# Altium PCB USB DockerPi MainBoard.PcbDoc
Units mm, origin at the board's own origin, x right, y up, seen from the top; angles counter-clockwise.
Board outline 65.99 x 57.08 mm, 2 copper layers (Top Layer, Bottom Layer); 33 components, 35 nets, 167 pads, 77 vias.
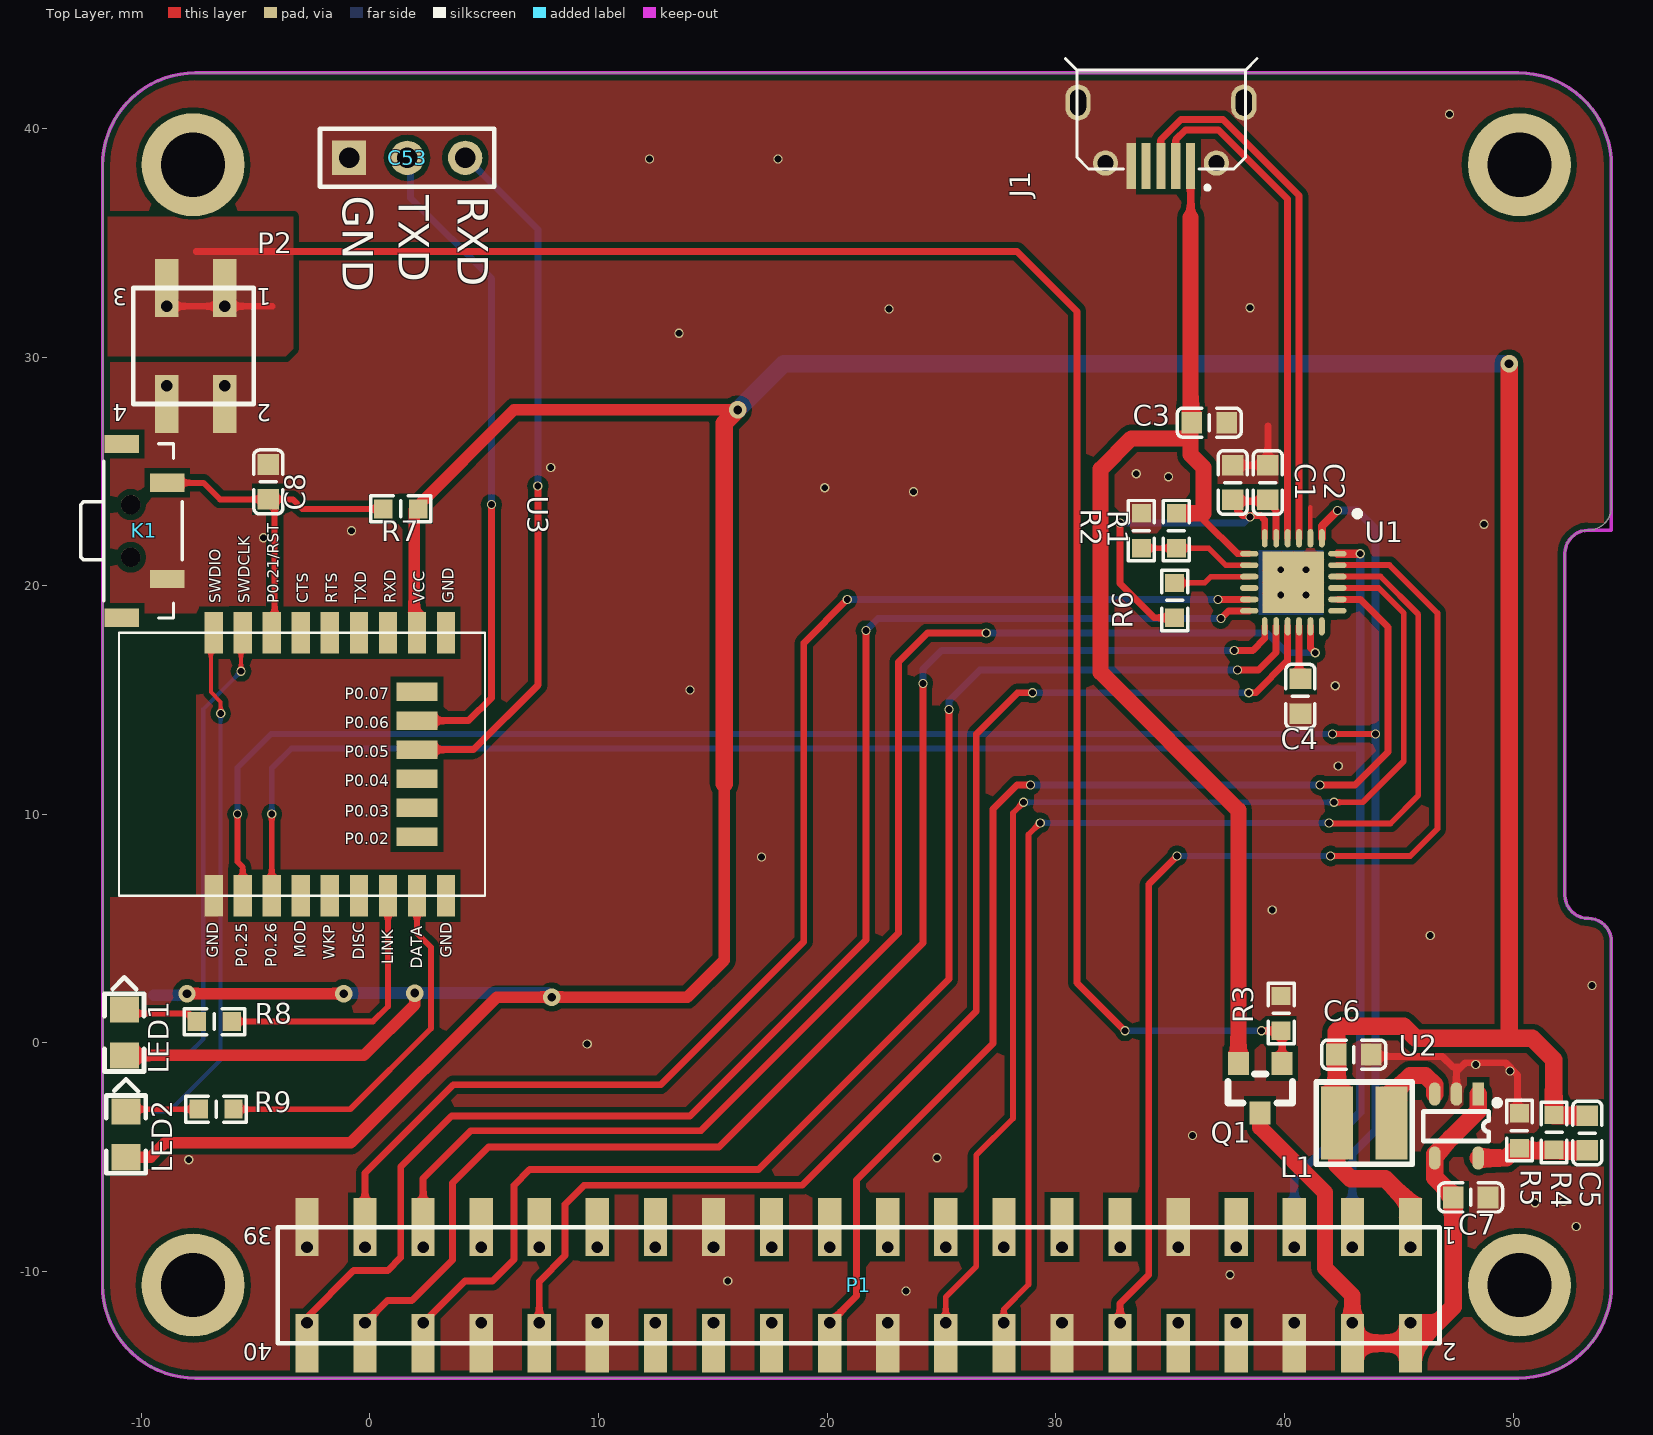
[diagram p0: Top Layer view]
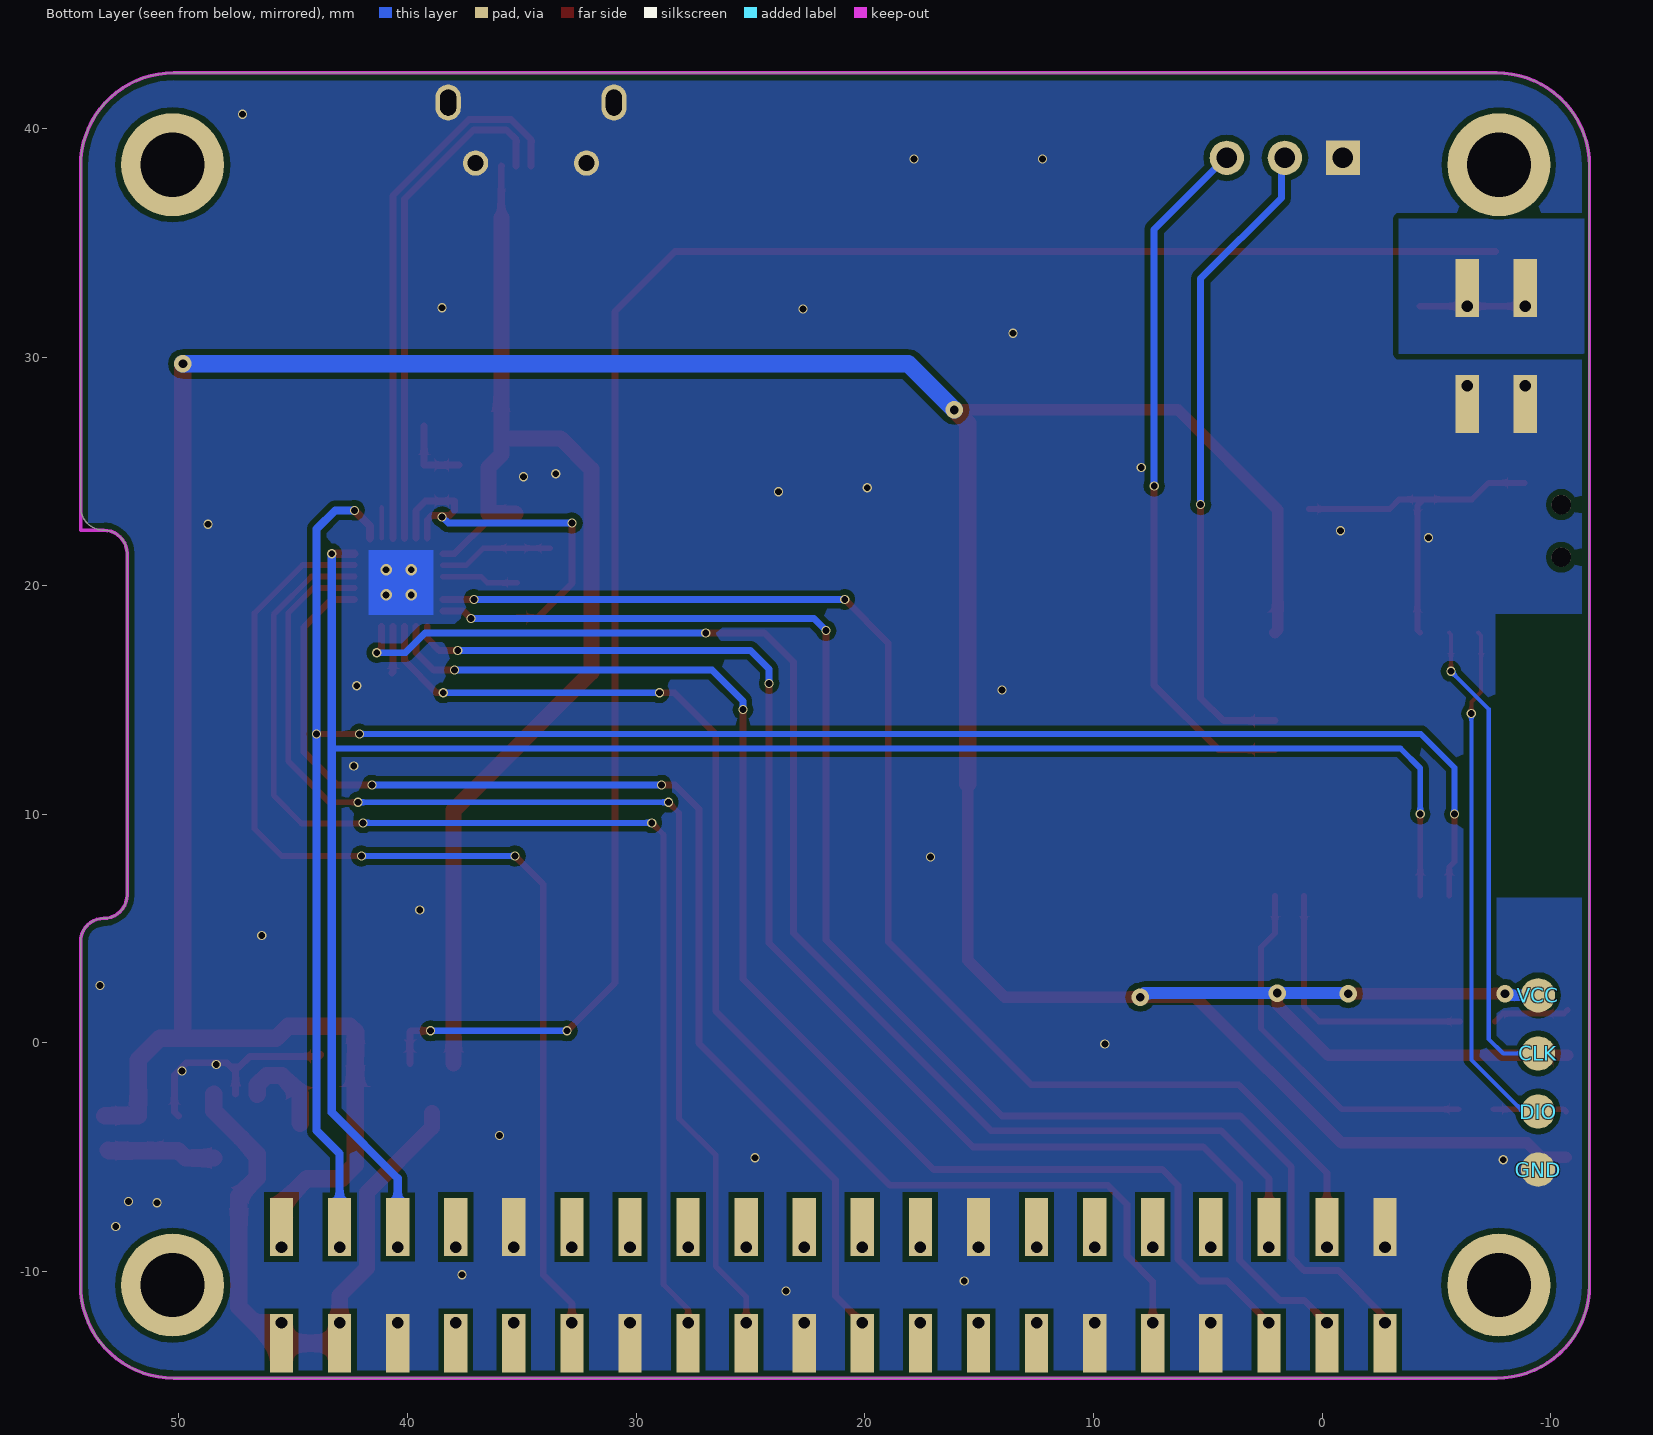
[diagram p1: Bottom Layer view, seen from below]
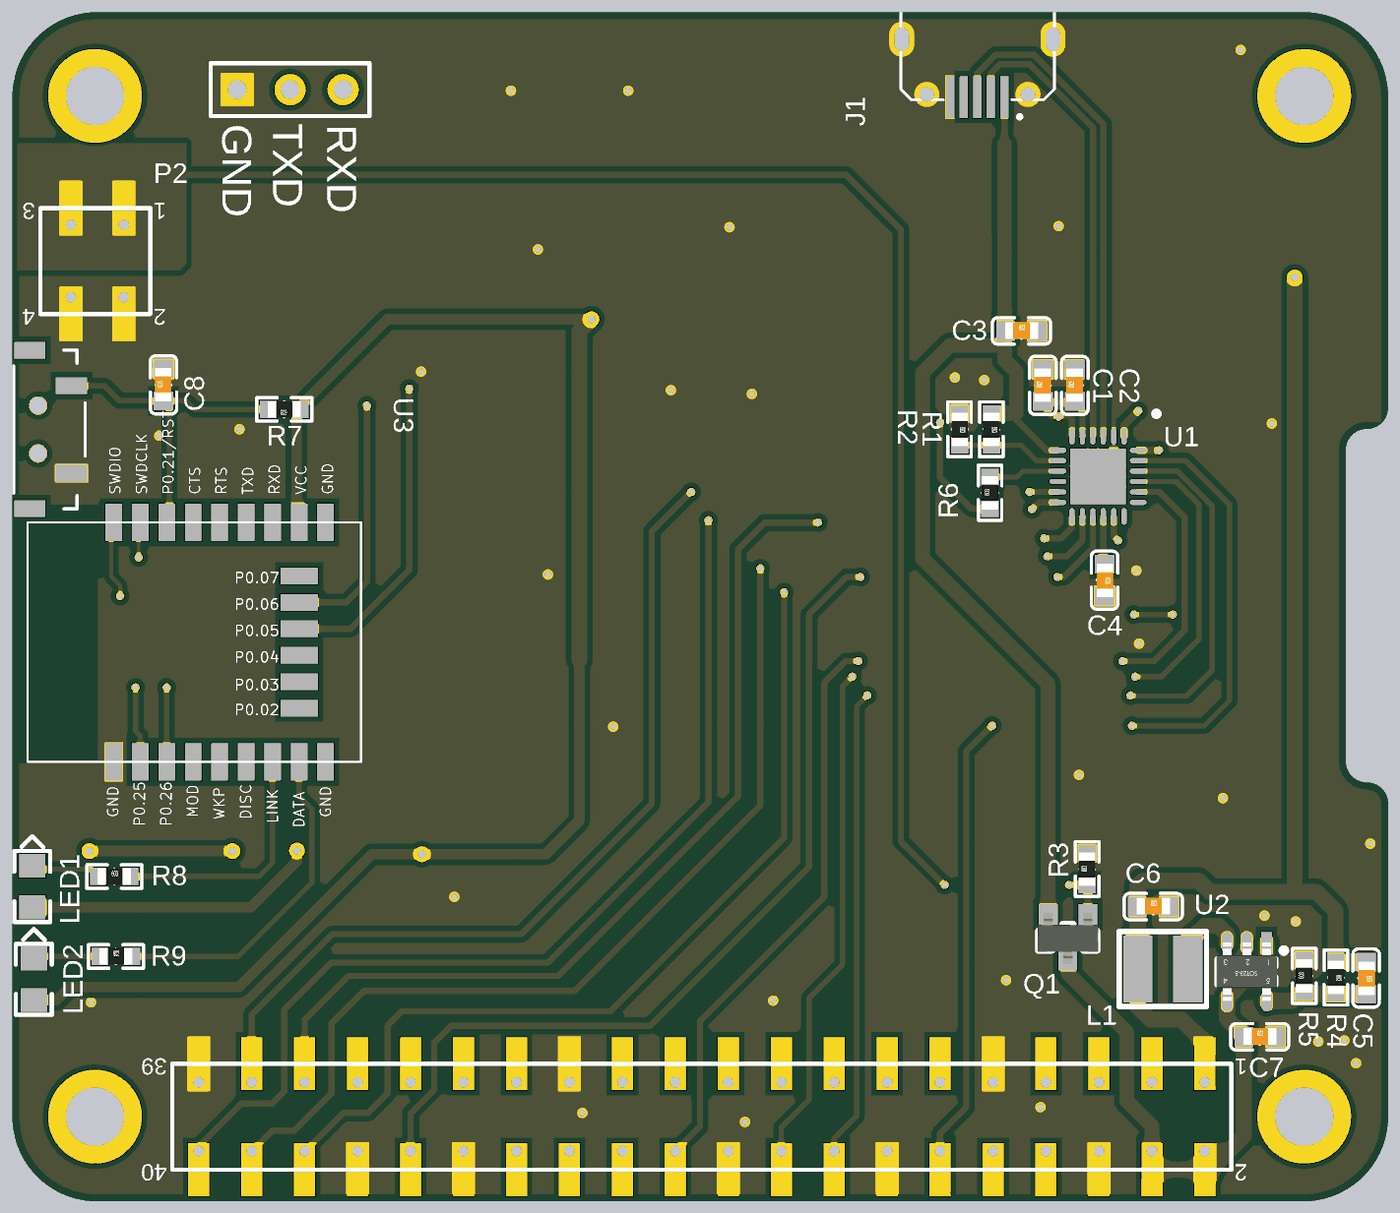
[diagram p2: 3D render of the assembled board from above, using the file's embedded part models]

## Layer stack, top to bottom
Top Solder: solder mask 0.0102, Solder Resist, Dk 3.5
Top Layer: signal copper 0.0356
Dielectric 1: dielectric 0.32, FR-4, Dk 4.8
Bottom Layer: signal copper 0.0356
Bottom Solder: solder mask 0.0102, Solder Resist, Dk 3.5

## Board outline
-11.697,-10.592 ccw(c-7.633,-10.592) -7.633,-14.656 50.229,-14.656 ccw(c50.229,-10.592) 54.293,-10.592 54.293,4.436 ccw(c53.277,4.436) 53.277,5.452 cw(c53.277,6.468) 52.261,6.468 52.261,21.408 cw(c53.277,21.408) 53.277,22.424 ccw(c53.277,23.44) 54.293,23.44 54.293,38.365 ccw(c50.229,38.365) 50.229,42.429 50.228,42.429 -7.633,42.429 ccw(c-7.633,38.365) -11.697,38.365
cut-out: -7.683,42.376

## Design rules (kind name [scope] priority, off if disabled: settings)
Clearance GND铺铜 [InNet('GND')] p1: gap=0.152 except(0.003: Region-Region; 0.254: Arc-Fill Arc-Poly Arc-Region Track-Fill Track-Poly Track-Region SMDPad-Fill SMDPad-Poly SMDPad-Region THPad-Fill THPad-Poly THPad-Region Via-Fill Via-Poly Via-Region Fill-Fill Fill-Poly Fill-Region Poly-Poly Poly-Region)
Clearance [All] p2: gap=0.152
ComponentClearance [All] p1: gap=0 collisioncheckmode=3 verticalgap=0 showdistances=FALSE
DiffPairsRouting "Schematic Differential Pairs Routing" [InNetClass('Undefined')] p1: maxlimit=0.254 minlimit=0.152 mostfreqgap=0.152 toplayer_minwidth=0.305 toplayer_maxwidth=0.381 toplayer_prefwidth=0.381 bottomlayer_minwidth=0.305 bottomlayer_maxwidth=0.381 bottomlayer_prefwidth=0.381 maxuncoupledlength=12.7
DiffPairsRouting [All] p2: maxlimit=0.254 minlimit=0.254 mostfreqgap=0.254 toplayer_minwidth=0.381 toplayer_maxwidth=0.381 toplayer_prefwidth=0.381 bottomlayer_minwidth=0.381 bottomlayer_maxwidth=0.381 bottomlayer_prefwidth=0.381 maxuncoupledlength=12.7
HoleSize [All] p1: absolutevalues=TRUE maxlimit=25.4 minlimit=0.025 maxpercent=80.000 minpercent=20.000
MinimumSolderMaskSliver [All] p1: minsoldermaskwidth=0
PlaneConnect [All] p1: planeconnectstyle=Direct reliefexpansion=0.508 reliefentries=4 reliefconductorwidth=0.254 reliefairgap=0.254
PolygonConnect PolygonConnect_5 [HasFootprint('NCE20P85G')] p1: connectstyle=Relief reliefconductorwidth=0.254 reliefentries=4 polygonreliefangle="45 Angle" airgapwidth=0.254
PolygonConnect PolygonConnect_4 [All vs IsNamedPolygon('RPI-5V_L02_P006')] p2: connectstyle=Relief reliefconductorwidth=0.254 reliefentries=4 polygonreliefangle="45 Angle" airgapwidth=0.254
PolygonConnect PolygonConnect_3 [All vs IsNamedPolygon('RPI-5V_L01_P002')] p3: connectstyle=Relief reliefconductorwidth=0.254 reliefentries=4 polygonreliefangle="45 Angle" airgapwidth=0.254
PolygonConnect PolygonConnect_2 [All vs IsNamedPolygon('VBUS_L01_P000')] p4: connectstyle=Relief reliefconductorwidth=0.254 reliefentries=4 polygonreliefangle="45 Angle" airgapwidth=0.254
PolygonConnect PolygonConnect_1 [All vs IsNamedPolygon('VBUS_L01_P000')] p5: connectstyle=Relief reliefconductorwidth=0.254 reliefentries=4 polygonreliefangle="45 Angle" airgapwidth=0.254
PolygonConnect [All] p6: connectstyle=Direct reliefconductorwidth=0.254 reliefentries=4 polygonreliefangle="45 Angle" airgapwidth=0.254
RoutingVias [All] p1: holewidth=0.305 width=0.406 viastyle="Through Hole" minholewidth=0.305 minwidth=0.406 maxholewidth=11.43 maxwidth=12.7
SilkToSilkClearance [All] p1: silktosilkclearance=0
SilkToSolderMaskClearance [IsPad] p1: minsilkscreentomaskgap=0 clearancetoexposedcopper=TRUE
SolderMaskExpansion [All] p1: expansion=0.051
Width [All] p1: maxlimit=2.54 minlimit=0.152 preferedwidth=0.203
23 further rules are at their usual default settings.

## Classes and differential pairs
component class "USB DockerPi MainBoard": 1 2 3v3 C1 C2 C3 C4 C5 C6 C7 J1 L1 P1 P2 Q1 R1 R2 R3 R4 R5 R6 TXD U1 U2
net class Undefined: USB_N USB_P
component class MCU: C8 CLK DIO GND K1 LED1 LED2 R7 R8 R9 U3 VCC
differential pair USB: +USB_P -USB_N

## Components (designator, comment, footprint, x,y, rotation, side; value= is the part's Value field where it differs from the comment)
C1 "0.1uF" CAP0603 37.732,24.511 r90 top
C2 "4.7uF" CAP0603 39.268,24.511 r90 top
C3 "1uF" CAP0603 36.703,27.127 r0 top
C4 "4.7uF" CAP0603 40.691,15.164 r270 top
C5 "10pF" CAP0603 53.238,-3.937 r270 top
C6 "10uF" CAP0603 43.028,-0.508 r0 top
C7 "4.7uF" CAP0603 48.133,-6.756 r0 top
C8 "1uF" CAP0603 -4.445,24.536 r90 top
C53 "0.1uF" HDR1X3 -0.914,38.71 r0 top
CLK "TP" "Test Point"#1 -9.449,-0.457 r0 top
DIO "TP" "Test Point"#2 -9.449,-2.997 r180 bottom
GND "TP" "Test Point"#2 -9.449,-5.537 r180 bottom
J1 "USB_micro_SMT" USB_Micro_SMT 34.59,39.741 r90 top
K1 "Button" Key-3X6_SMD -9.861,22.396 r270 top
L1 "2.2uH" 3015 43.485,-3.505 r180 top
LED1 "LED" LED0805 -10.744,0.457 r90 top
LED2 "LED" LED0805 -10.668,-3.997 r90 top
P1 "RPI_IO_40P" 40PiiMoGai 45.504,-9.322 r180 top locked
P2 "Header 2X2" NEW_HDR2X2SMD -7.62,30.48 r180 top locked
Q1 "P-MOS" SOT-23 38.938,-1.981 r270 top
R1 "24K" RES0603 35.27,22.404 r270 top
R2 "47K" RES0603 33.741,22.404 r270 top
R3 "10K" RES0603 39.853,1.295 r90 top
R4 "180K" RES0603 51.791,-3.912 r270 top
R5 "39K" RES0603 50.267,-3.835 r90 top
R6 "4.7K" RES0603 35.194,19.356 r90 top
R7 "10K" RES0603 1.346,23.355 r180 top
R8 "1K" RES0603 -6.807,0.94 r0 top
R9 "1K" RES0603 -6.731,-2.896 r0 top
U1 "CP2112" CP2112 40.381,20.148 r270 top
U2 "RT8059" SOT-23-5 47.513,-3.632 r270 top
U3 "nRF52810模块" E104-BT5010A 5.027,17.872 r180 top
VCC "TP" "Test Point"#1 -9.449,2.083 r0 top

## Footprints (in the part's own frame and the unit in brackets; to place one, negate y for a bottom-side part, rotate by r counter-clockwise, add the part's x,y. Pads: shape width x height; smd on the part's side, far side on the other; paste and mask are expansions set on the pad)
40PiiMoGai [mil]
  rect 40x100 hole 20 copper offset 0,-35: 1(0,-15) 3(100,-15) 5(200,-15) 7(300,-15) 9(400,-15) 11(500,-15) 13(600,-15) 15(700,-15) 17(800,-15) 19(900,-15) 21(1000,-15) 23(1100,-15) 25(1200,-15) 27(1300,-15) 29(1400,-15) 31(1500,-15) 33(1600,-15) 35(1700,-15) 37(1800,-15) 39(1900,-15)
  rect 40x100 hole 20 copper offset 0,35: 2(0,115) 4(100,115) 6(200,115) 8(300,115) 10(400,115) 12(500,115) 14(600,115) 16(700,115) 18(800,115) 20(900,115) 22(1000,115) 24(1100,115) 26(1200,115) 28(1300,115) 30(1400,115) 32(1500,115) 34(1600,115) 36(1700,115) 38(1800,115) 40(1900,115)
  silkscreen extent -50,-50 1950,150
3015 [mm]
  rect 1.4x3.2 smd: 1(-1.2,0) 2(1.2,0)
  silkscreen extent -2.1,-1.8 2.1,1.8
CAP0603 [mm]
  rect 0.9x0.95 smd: 1(-0.762,0) 2(0.762,0)
  silkscreen extent -1.4,-0.64 1.4,0.64, body extent -0.79,-0.38 0.81,0.42, height 0.3
CP2112 [mm] "QFN, 24-Leads, Body 4.00x4.00mm, Pitch 0.50mm, Thermal Pad 2.68x2.68mm, IPC Medium Density"
  oval 0.8x0.25 smd: 1(-1.925,1.25) 2(-1.925,0.75) 3(-1.925,0.25) 4(-1.925,-0.25) 5(-1.925,-0.75) 6(-1.925,-1.25) 13(1.925,-1.25) 14(1.925,-0.75) 15(1.925,-0.25) 16(1.925,0.25) 17(1.925,0.75) 18(1.925,1.25)
  oval 0.25x0.8 smd: 7(-1.25,-1.925) 8(-0.75,-1.925) 9(-0.25,-1.925) 10(0.25,-1.925) 11(0.75,-1.925) 12(1.25,-1.925) 19(1.25,1.925) 20(0.75,1.925) 21(0.25,1.925) 22(-0.25,1.925) 23(-0.75,1.925) 24(-1.25,1.925)
  rect 2.68x2.68 smd: 25(0,0)
  silkscreen extent -3.12,2.68 -2.88,2.93, body extent -2,-2 2,2, height 0.8
E104-BT5010A [mm]
  rect 0.8x1.8 smd: 1(11.86,11.43) 2(10.59,11.43) 3(9.32,11.43) 4(8.05,11.43) 5(6.78,11.43) 6(5.51,11.43) 7(4.24,11.43) 8(2.97,11.43) 9(1.7,11.43) 16(1.7,-0.07) 17(2.97,-0.07) 18(4.24,-0.07) 19(5.51,-0.07) 20(6.78,-0.07) 21(8.05,-0.07) 22(9.32,-0.07) 23(10.59,-0.07) 24(11.86,-0.07)
  rect 1.8x0.8 smd: 10(2.97,8.855) 11(2.97,7.585) 12(2.97,6.315) 13(2.97,5.045) 14(2.97,3.775) 15(2.97,2.505)
  silkscreen extent 0,-0.07 16,11.43
HDR1X3 [mm] "Connector; Header; 3 Position"
  rect 1.5x1.5 hole 0.9: 1(0,0)
  round 1.5 hole 0.9: 2(2.54,0) 3(5.08,0)
  silkscreen extent -1.27,-1.27 6.35,1.27
Key-3X6_SMD [mm] "3X6X3.5H"
  rect 0.8x1.5 smd: 0(-3.8,-1) 0(3.8,-1) 1(-2.1,1) 2(2.1,1)
  round 0.85 hole 0.85: 4(-1.15,-0.6) 4(1.15,-0.6)
  silkscreen extent -3.81,-2.79 3.81,1.65
LED0805 [mm]
  rect 1.143x1.27 smd: 1(-1,0) 2(1,0)
  silkscreen extent -1.7,-0.86 2.41,0.86, body extent -1,-0.64 1,0.64, height 1.1
NEW_HDR2X2SMD [mm]
  rect 1.016x2.54 hole 0.5 copper offset 0,-0.8: 1(-1.27,-1.74) 3(1.27,-1.74)
  rect 1.016x2.54 hole 0.5 copper offset 0,0.8: 2(-1.27,1.74) 4(1.27,1.74)
  silkscreen extent -2.54,-2.54 2.73,2.54
RES0603 [mm]
  rect 0.8x0.83 smd: 1(-0.762,0) 2(0.762,0)
  silkscreen extent -1.32,-0.57 1.32,0.56, body extent -0.8,-0.4 0.8,0.4, height 0.3
SOT-23 [mil]
  rect 40x36 smd: 1(-42.5,37.5) 2(-42.5,-37.5) 3(42.5,-0.5)
  silkscreen extent -25,-56 25,55, body extent -47,-57 50,57, height 39
SOT-23-5 [mil]
  rect 40x20 smd: 1(-55,37.4)
  oval 40x20 smd: 2(-55,0) 3(-55,-37.4) 4(55,-37.4) 5(55,37.4)
  silkscreen extent -45,-57 26,75, body extent -55,-57 55,57, height 43
"Test Point"#1 [mm]
  round 1.5 smd far side: 1(0,0)
"Test Point"#2 [mm]
  round 1.5 smd: 1(0,0)
USB_Micro_SMT [mm] "MicroUSB,4脚插固定"
  round 1.1 hole 0.7: 0(-1.262,2.425) 0(-1.262,-2.425)
  oval 1.575x1.1 hole 0.7 slot 1.143 at 0 deg: 0(1.388,3.625) 0(1.388,-3.625)
  rect 2x0.4 smd: 1(-1.387,-1.3) 2(-1.387,-0.65) 3(-1.387,0) 4(-1.387,0.65) 5(-1.387,1.3)
  silkscreen extent -2.36,-4.2 3.31,4.18

## Part data
C8: library part CAP
CLK DIO GND VCC: library part "Test Point", "Test Point"
J1: "microUSB-B,5P/F,7.6×9×4,SMD,RoHS"
K1: library part KEY-3
L1: library part Inductor, "Inductor"
P2: "Header, 2-Pin, Dual row"
Q1: "P-Channel Power MOSFET"
R1 R2 R3 R4 R5 R6 R7 R8 R9: library part RES
U2: "PWM Step-Down DC/DC"

## Free pads (board coordinates)
  round 4.5 hole 2.8: 0(-7.733,-10.592) 0(-7.733,38.408) 0(50.267,-10.592) 0(50.267,38.408)

## Via types
v1: diameter 0.4, hole 0.3, Top Layer to Bottom Layer, 67 vias
v2: diameter 0.762, hole 0.381, Top Layer to Bottom Layer, 6 vias
v3: diameter 0.5, hole 0.3, Top Layer to Bottom Layer, 4 vias

## Nets (pads, with @x,y where several pads share a name; then routed paths per layer and width w, separated by ;. In a path a pad name is that pad's centre, name@x,y a point inside that pad or via, vN(x,y) a via of type N, cw(c..) or ccw(c..) an arc to the next point about the centre after c; other vN are vias at no path point)
3.3V: C5.1 C6.1 L1.2 LED1.1 LED2.1 P1.1 R4.1 R7.1 U3.17 VCC.1 | length 196.9
  Top Layer w0.508: LED1.1 -0.263,-0.543 1.956,1.676 v2(1.956,2.184) ; LED2.1 -9.595,-4.997 -8.966,-4.369 -0.838,-4.369 5.537,2.007 v2(7.95,2.007) 13.884,2.007 15.496,3.619 15.496,11.342 ; v2(-8.001,2.159) v2(-1.143,2.159) ; U3.17 1.93,18.069 1.93,23.317 6.299,27.686 v2(16.078,27.686)
  Top Layer w0.762: 15.496,11.342 15.496,27.104 v2(16.078,27.686) ; P1.1 45.504,-7.049 44.399,-5.944 42.901,-5.944 42.285,-5.328 L1.2 42.285,-0.527 C6.1 42.266,0.484 42.518,0.737 45.212,0.737 45.745,0.203 49.817,0.203 ; v2(49.817,29.7) 49.817,0.203 ; R4.1 R4.1@51.816,-3.175 ; C5.1 R4.1@51.816,-3.175 ; 49.817,0.203 50.833,0.203 51.765,-0.729 51.765,-3.175 R4.1@51.816,-3.175
  Bottom Layer w0.508: VCC.1 -8.077,2.083 v2(-8.001,2.159) ; v2(-1.143,2.159) -1.118,2.184 v2(1.956,2.184) 7.772,2.184 v2(7.95,2.007)
  Bottom Layer w0.762: v2(16.078,27.686) 18.092,29.7 v2(49.817,29.7)
5V: C7.1 P1.2 P1.4 Q1.3 U2.1 U2.4 | length 26.3
  Top Layer w0.7: Q1.3 38.925,-3.696 41.758,-6.528 41.758,-9.83 42.964,-11.036 P1.4
  Top Layer w0.762: P1.4@42.964,-13.132 45.771,-13.132 47.371,-11.532 C7.1 47.371,-6.694 46.563,-5.887 U2.4 46.563,-4.872 48.463,-2.972 U2.1
+12: P2.1 P2.3 Q1.1 R3.1 | length 84.8
  Top Layer w0.3: P2.3 P2.1 -4.28,32.22 ; -7.595,34.62 28.296,34.62 30.919,31.997 30.919,2.634 v1(33.02,0.533) ; v1(38.989,0.533) R3.1 39.891,0.495 Q1.1
  Bottom Layer w0.3: v1(33.02,0.533) v1(38.989,0.533)
GND: C1.2 C2.2 C3.2 C4.2 C6.2 C7.2 C8.2 C53.1 GND.1 J1.0 J1.5 K1.2 P1.6 P1.9 P1.14 P1.20 P1.25 P1.30 P1.34 P1.39 P2.2 P2.4 R2.1 R3.2 R5.2 U1.2 U1.25 U2.2 U3.1 | length 14.7
  Top Layer w0.2: U1.2 41.131,23.427
  Top Layer w0.305: C1.2 C2.2 39.268,26.979 ; C6.2 43.866,-0.584 46.894,-0.584 47.369,-1.059 47.709,-1.059 ; U2.2 47.513,-1.255 47.709,-1.059 ; R5.2@50.013,-3.194 50.19,-3.016 50.19,-1.397 49.657,-0.864 47.904,-0.864 47.709,-1.059
  other v1: 23.444,-10.846 15.646,-10.414 37.617,-10.135 52.756,-8.026 50.944,-6.985 52.191,-6.934 -7.925,-5.105 24.796,-5.021 35.966,-4.039 49.86,-1.219 48.362,-0.94 9.5,-0.038 53.442,2.515 46.368,4.699 39.462,5.817 17.12,8.128 42.348,12.116 13.991,15.434 42.215,15.621 -4.648,22.098 -0.803,22.403 48.717,22.683 23.774,24.105 19.888,24.282 34.92,24.765 33.514,24.892 7.907,25.171 13.513,31.039 22.702,32.106 38.488,32.156 12.217,38.659 17.844,38.659 47.219,40.615
  other v3: 39.831,19.598 40.931,19.598 39.831,20.698 40.931,20.698
GPIO0: P1.12 U1.23 | length 48
  Top Layer w0.254: v1(42.012,8.179) 45.491,8.179 46.683,9.37 46.683,18.798 44.584,20.898 U1.23
  Top Layer w0.3: P1.12 32.804,-11.392 34.061,-10.135 34.061,6.945 v1(35.295,8.179)
  Bottom Layer w0.254: v1(35.295,8.179) v1(42.012,8.179)
GPIO1: P1.16 U1.22 | length 51.7
  Top Layer w0.254: P1.16 27.724,-11.646 28.804,-10.566 28.804,9.119 v1(29.312,9.627) ; v1@41.935,9.601 44.628,9.601 45.847,10.82 45.847,18.745 44.195,20.398 U1.22
  Bottom Layer w0.254: v1(29.312,9.627) v1(41.935,9.627)
GPIO2: P1.18 U1.21 | length 51.4
  Top Layer w0.254: P1.18 25.184,-11.112 26.518,-9.779 26.518,-4.903 28.118,-3.303 28.118,10.061 v1(28.587,10.529) ; v1(42.164,10.529) 43.422,10.529 45.212,12.319 45.212,18.805 44.12,19.898 U1.21
  Bottom Layer w0.254: v1(28.587,10.529) v1(42.164,10.529)
GPIO3: P1.22 U1.20 | length 51.9
  Top Layer w0.3: P1.22 21.285,-11.062 21.285,-5.994 27.254,-0.025 27.254,10.236 28.296,11.278 v1(28.88,11.278) ; v1(41.554,11.278) 43.078,11.278 44.529,12.728 44.529,18.184 43.315,19.398 U1.20
  Bottom Layer w0.3: v1(28.88,11.278) v1(41.554,11.278)
GPIO4: P1.32 U1.15 | length 55.7
  Top Layer w0.3: P1.32 7.404,-10.427 8.534,-9.296 8.534,-7.055 9.366,-6.223 18.898,-6.223 26.518,1.397 26.518,13.513 28.321,15.316 v1(28.981,15.316) ; v1(38.43,15.316) 38.729,15.316 40.131,16.718 U1.15
  Bottom Layer w0.3: v1(28.981,15.316) v1(38.43,15.316)
GPIO5: P1.36 U1.14 | length 59.6
  Top Layer w0.3: P1.36 4.153,-10.414 5.359,-10.414 6.299,-9.474 6.299,-6.223 6.985,-5.537 16.993,-5.537 25.324,2.794 v1(25.324,14.58) ; v1(37.948,16.307) 38.862,16.307 39.631,17.075 U1.14
  Bottom Layer w0.3: v1(25.324,14.58) 25.324,14.961 26.67,16.307 v1(37.948,16.307)
GPIO6: P1.38 U1.13 | length 61.3
  Top Layer w0.3: P1.38 0.762,-11.265 1.829,-11.265 3.607,-9.487 3.607,-6.121 5.182,-4.547 15.265,-4.547 24.181,4.369 v1(24.181,15.723) ; v1(37.795,17.17) 38.608,17.17 39.131,17.693 U1.13
  Bottom Layer w0.3: v1(24.181,15.723) 24.181,16.358 24.994,17.17 v1(37.795,17.17)
GPIO7: P1.40 U1.12 | length 64.5
  Top Layer w0.3: P1.40 -2.756,-12.001 -0.711,-9.957 0.781,-9.957 1.346,-9.391 1.346,-5.431 3.576,-3.2 13.991,-3.2 21.692,4.5 v1(21.692,18.035) ; v1(37.211,18.567) 37.541,18.898 U1.12
  Bottom Layer w0.3: v1(21.692,18.035) 22.224,18.567 v1(37.211,18.567)
NetC4_1: C4.1 U1.16 | length 2.1
  Top Layer w0.3: U1.16 40.631,16.215 C4.1@40.665,16.18
NetC5_2: C5.2 R4.2 R5.1 U2.5 | length 4.8
  Top Layer w0.762: U2.5 49.701,-5.029 50.013,-4.718 53.067,-4.718 C5.2@53.086,-4.699
NetC8_1: C8.1 K1.1 R7.2 U3.22 | length 15.9
  Top Layer w0.254: K1.1 -7.275,24.496 -6.553,23.774 C8.1 ; U3.22 -4.169,18.066 -4.169,23.498 C8.1 ; R7.2 -2.959,23.355 -3.378,23.774 C8.1
NetL1_1: L1.1 U2.3 | length 4.1
  Top Layer w0.762: L1.1 44.685,-2.229 45.491,-1.422 46.152,-1.422 46.563,-1.834 U2.3
NetLED1_2: LED1.2 R8.1 | length 3.4
  Top Layer w0.254: LED1.2 -10.577,1.29 -7.919,1.29 R8.1
NetLED2_2: LED2.2 R9.1 | length 3.2
  Top Layer w0.254: LED2.2 -10.566,-2.896 R9.1
NetR1_2: R1.2 R2.2 U1.8 | length 5
  Top Layer w0.24: R2.2 R1.2 36.678,21.642 37.422,20.898 U1.8
NetR6_2: R6.2 U1.9 | length 3.4
  Top Layer w0.24: R6.2 36.501,20.118 36.781,20.398 U1.9
NetR8_2: R8.2 U3.7 | length 11.9
  Top Layer w0.254: R8.2 0.127,0.94 0.787,1.6 U3.7
NetR9_2: R9.2 U3.8 | length 16.2
  Top Layer w0.254: R9.2 -0.864,-2.896 2.667,0.635 2.667,4.191 2.057,4.801 U3.8
RXD: C53.3 U3.13 | length 30.9
  Top Layer w0.305: U3.13 4.521,12.827 7.341,15.646 v1(7.341,24.359)
  Bottom Layer w0.305: C53.3 4.216,38.71 7.341,35.585 v1(7.341,24.359)
S\U\S\P\E\N\D\: P1.35 U1.17 | length 60.5
  Top Layer w0.3: P1.35 2.324,-5.931 4.42,-3.835 14.478,-3.835 23.114,4.801 23.114,16.662 24.384,17.932 v1(26.949,17.932) ; U1.17 41.131,17.279 v1(41.341,17.069)
  Bottom Layer w0.3: v1(26.949,17.932) 39.223,17.932 40.087,17.069 v1(41.341,17.069)
SCL: P1.5 U1.24 U3.3 | length 86.1
  Top Layer w0.254: U3.3 -4.293,8.484 v1(-4.293,10.008)
  Top Layer w0.356: U1.24 v1(43.306,21.398)
  Bottom Layer w0.254: v1(-4.293,10.008) -4.293,12.014 -3.428,12.879 43.254,12.879 43.306,12.827
  Bottom Layer w0.356: P1.5 40.424,-5.915 43.306,-3.034 43.306,12.827 v1(43.306,21.398)
SDA: P1.3 U1.1 U3.2 | length 91.3
  Top Layer w0.254: v1(-5.791,10.008) -5.791,7.925 -5.563,7.696 U3.2 ; v1(42.101,13.513) v1(43.967,13.513)
  Top Layer w0.356: U1.1 41.631,22.612 v1(42.311,23.292)
  Bottom Layer w0.254: v1(-5.791,10.008) -5.791,12.04 -4.318,13.513 v1(42.101,13.513)
  Bottom Layer w0.356: v1@42.355,23.292 43.155,23.292 43.967,22.479 v1(43.967,13.513) 43.967,-3.835 42.964,-4.839 P1.3
SUSPEND: P1.37 U1.11 | length 59.9
  Top Layer w0.3: P1.37 -0.216,-5.687 3.642,-1.829 12.7,-1.829 18.974,4.445 18.974,17.501 v1(20.871,19.398) ; v1(37.092,19.398) U1.11
  Bottom Layer w0.3: v1@20.963,19.398 v1(37.092,19.398)
SWCLK: CLK.1 U3.23 | length 21
  Top Layer w0.178: v1@-5.69,16.307 v1(-5.639,16.256) -5.639,17.866 U3.23
  Bottom Layer w0.178: CLK.1 -7.925,-0.457 -7.29,0.178 -7.29,14.605 v1(-5.639,16.256)
SWDCLK: 
SWDIO: DIO.1 U3.24 | length 22.8
  Top Layer w0.178: U3.24 -6.96,17.815 -6.96,15.342 -6.528,14.91 v1(-6.528,14.402)
  Bottom Layer w0.178: DIO.1 -8.788,-2.997 -6.528,-0.737 v1(-6.528,14.402)
TXD: C53.2 U3.14 | length 29
  Top Layer w0.305: U3.14 4.318,14.097 5.309,15.088 v1(5.309,23.546)
  Bottom Layer w0.305: C53.2@1.778,38.989 1.778,36.957 5.309,33.426 v1(5.309,23.546)
USB_N: J1.2 U1.4 | length 22.3
  Top Layer w0.305: J1.2 35.24,39.506 35.663,39.929 37.109,39.929 40.131,36.908 U1.4
USB_P: J1.3 U1.3 | length 23.9
  Top Layer w0.305: J1.3 34.59,39.506 35.47,40.386 37.299,40.386 40.631,37.054 U1.3
VBUS: C3.1 J1.1 Q1.2 R1.1 U1.7 | length 52.5
  Top Layer w0.3: 35.89,36.093 35.895,38.349 J1.1 ; 36.457,23.166 36.457,22.877 37.937,21.398 U1.7
  Top Layer w0.7: R1.1 36.457,23.166 36.457,25.163 35.895,25.726 35.895,26.441 ; 35.89,36.093 35.894,27.127 35.895,26.441 ; Q1.2 37.973,-0.889 37.973,10.185 31.953,16.205 31.953,25.095 33.299,26.441 35.895,26.441
VDD: C1.1 C2.1 R6.1 U1.5 U1.6 | length 17.1
  Top Layer w0.3: v1(32.804,22.739) 32.804,20.097 34.307,18.594 R6.1 ; U1.6 39.131,22.871 38.94,23.061 38.153,23.061 37.937,23.277 37.937,23.698 39.218,23.698 39.631,23.285 U1.5
  Bottom Layer w0.3: v1(32.804,22.739) 38.21,22.739 v1(38.482,23.01)
pads on no net: J1.4 K1.0 K1.4 P1.7 P1.8 P1.10 P1.11 P1.13 P1.15 P1.17 P1.19 P1.21 P1.23 P1.24 P1.26 P1.27 P1.28 P1.29 P1.31 P1.33 U1.10 U1.18 U1.19 U3.4 U3.5 U3.6 U3.9 U3.10 U3.11 U3.12 U3.15 U3.16 U3.18 U3.19 U3.20 U3.21

## Polygon pours and split planes (outlines as drawn)
+12 on Top Layer "Top Layer-No Net" (solid, remove dead copper, pour order 36): -11.735,36.22 -11.659,36.144 -3.353,36.144 -3.353,30.353 -3.607,30.099 -3.683,30.023 -11.811,30.023
GND on Top Layer "Top Layer-No Net" (solid, remove dead copper, pour order 46): -11.76,42.672 54.153,42.672 54.28,42.799 54.559,42.52 54.559,-14.834 -11.659,-14.834 -12.04,-14.453
+12 on Bottom Layer "Top Layer-No Net" (solid, remove dead copper, pour order 38): -11.464,36.041 -3.353,36.041 -3.353,30.15 -11.413,30.15 -11.464,30.099
GND on Bottom Layer "Top Layer-No Net" (solid, remove dead copper, pour order 44): -11.811,42.647 54.483,42.647 54.508,42.672 54.381,42.545 54.381,19.019 54.381,-14.732 54.28,-14.834 -11.811,-14.834

## Keep-outs
Keep-Out Layer:
  lines w0.152: -11.697,-10.592 ccw(c-7.633,-10.592) -7.633,-14.656 50.229,-14.656 ccw(c50.229,-10.592) 54.293,-10.592 54.293,4.436 ccw(c53.277,4.436) 53.277,5.452 cw(c53.277,6.468) 52.261,6.468 52.261,21.408 cw(c53.277,21.408) 53.277,22.424 54.293,22.424 54.293,38.365 ccw(c50.229,38.365) 50.229,42.429 -7.633,42.429 ccw(c-7.633,38.365) -11.697,38.365 -11.697,-10.592

## Other copper
Top Layer:
  pour cut-out: -11.608,18.783 -7.595,18.783 -7.595,6.363 -11.557,6.363 -11.659,6.464
Bottom Layer:
  rectangle net GND: 38.862,18.72 41.7,21.554
  pour cut-out: -11.582,18.771 -7.569,18.771 -7.569,6.35 -11.532,6.35 -11.633,6.452

## Silkscreen, mask and mechanical layers (free items; w line width, h text height)
Top Overlay:
  text "TXD" at 0.813,37.084 h2.29 r270
  text "GND" at -1.626,37.059 h2.29 r270
  text "RXD" at 3.404,37.033 h2.29 r270

## Text inside footprints (layer, text, board x,y; h text height)
C1: Mechanical 15 "1" at 38.077,24.385 h0.58 r90
C2: Mechanical 15 "1" at 39.613,24.385 h0.58 r90
C3: Mechanical 15 "1" at 36.577,26.782 h0.58
C4: Mechanical 15 "1" at 40.346,15.29 h0.58 r270
C5: Mechanical 15 "1" at 52.893,-3.811 h0.58 r270
C6: Mechanical 15 "1" at 42.902,-0.853 h0.58
C7: Mechanical 15 "1" at 48.007,-7.101 h0.58
C8: Mechanical 15 "1" at -4.1,24.41 h0.58 r90
P1: Top Overlay "2" at 47.536,-12.878 h1.27 r180; Top Overlay "40" at -4.28,-12.878 h1.27 r180; Top Overlay "39" at -4.28,-7.798 h1.27 r180; Top Overlay "1" at 47.536,-7.798 h1.27 r180
P2: Top Overlay "2" at -4.318,28.194 h1.27 r180; Top Overlay "4" at -10.604,28.194 h1.27 r180; Top Overlay "3" at -10.604,33.274 h1.27 r180; Top Overlay "1" at -4.318,33.274 h1.27 r180
R1: Mechanical 15 "1" at 34.925,22.53 h0.58 r270
R2: Mechanical 15 "1" at 33.396,22.53 h0.58 r270
R3: Mechanical 15 "1" at 40.198,1.169 h0.58 r90
R4: Mechanical 15 "1" at 51.446,-3.786 h0.58 r270
R5: Mechanical 15 "1" at 50.612,-3.961 h0.58 r90
R6: Mechanical 15 "1" at 35.539,19.23 h0.58 r90
R7: Mechanical 15 "1" at 1.472,23.7 h0.58 r180
R8: Mechanical 15 "1" at -6.933,0.595 h0.58
R9: Mechanical 15 "1" at -6.857,-3.241 h0.58
U3: Top Overlay "GND" at 3.667,19.233 h0.5 r90; Top Overlay "GND" at 3.567,3.733 h0.5 r90; Top Overlay "P0.03" at -1.095,9.896 h0.5; Top Overlay "P0.06" at -1.095,13.767 h0.5; Top Overlay "P0.02" at -1.095,8.698 h0.5; Top Overlay "P0.04" at -1.095,11.227 h0.5; Top Overlay "P0.05" at -1.095,12.497 h0.5; Top Overlay "P0.07" at -1.095,15.037 h0.5; Top Overlay "SWDIO" at -6.533,19.233 h0.5 r90; Top Overlay "SWDCLK" at -5.258,19.233 h0.5 r90; Top Overlay "P0.21/RST" at -3.983,19.233 h0.5 r90; Top Overlay "CTS" at -2.708,19.233 h0.5 r90; Top Overlay "RTS" at -1.433,19.233 h0.5 r90; Top Overlay "TXD" at -0.158,19.233 h0.5 r90; Top Overlay "RXD" at 1.117,19.233 h0.5 r90; Top Overlay "VCC" at 2.392,19.233 h0.5 r90; Top Overlay "DATA" at 2.292,3.242 h0.5 r90; Top Overlay "LINK" at 1.017,3.445 h0.5 r90; Top Overlay "DISC" at -0.258,3.636 h0.5 r90; Top Overlay "WKP" at -1.533,3.63 h0.5 r90; Top Overlay "MOD" at -2.808,3.733 h0.5 r90; Top Overlay "P0.26" at -4.083,3.305 h0.5 r90; Top Overlay "P0.25" at -5.358,3.305 h0.5 r90; Top Overlay "GND" at -6.633,3.733 h0.5 r90